# EAGLE board microSRCPProMiniV3 (EAGLE 6.5.0)
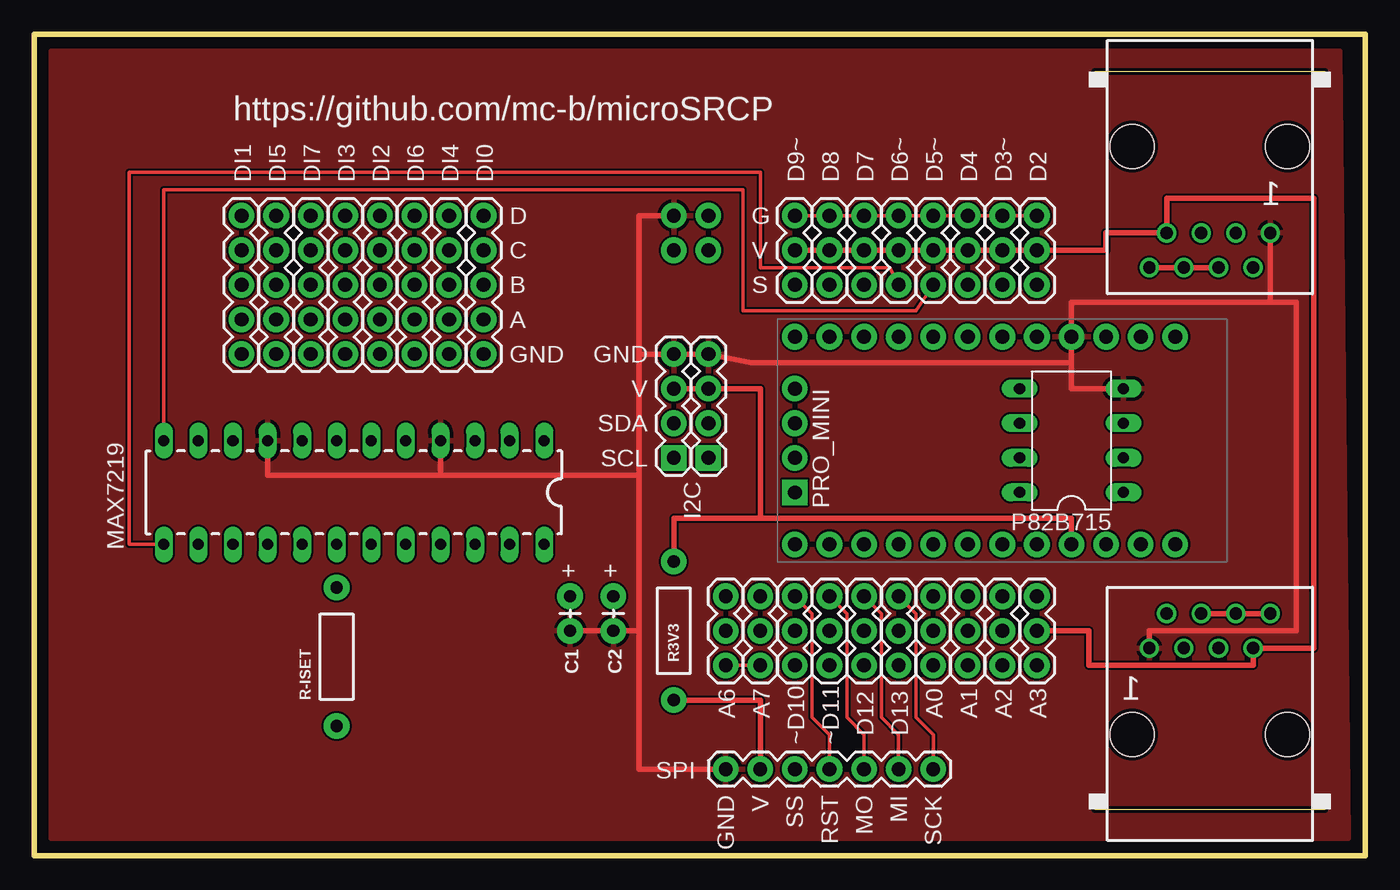
[diagram p0: board, top side]
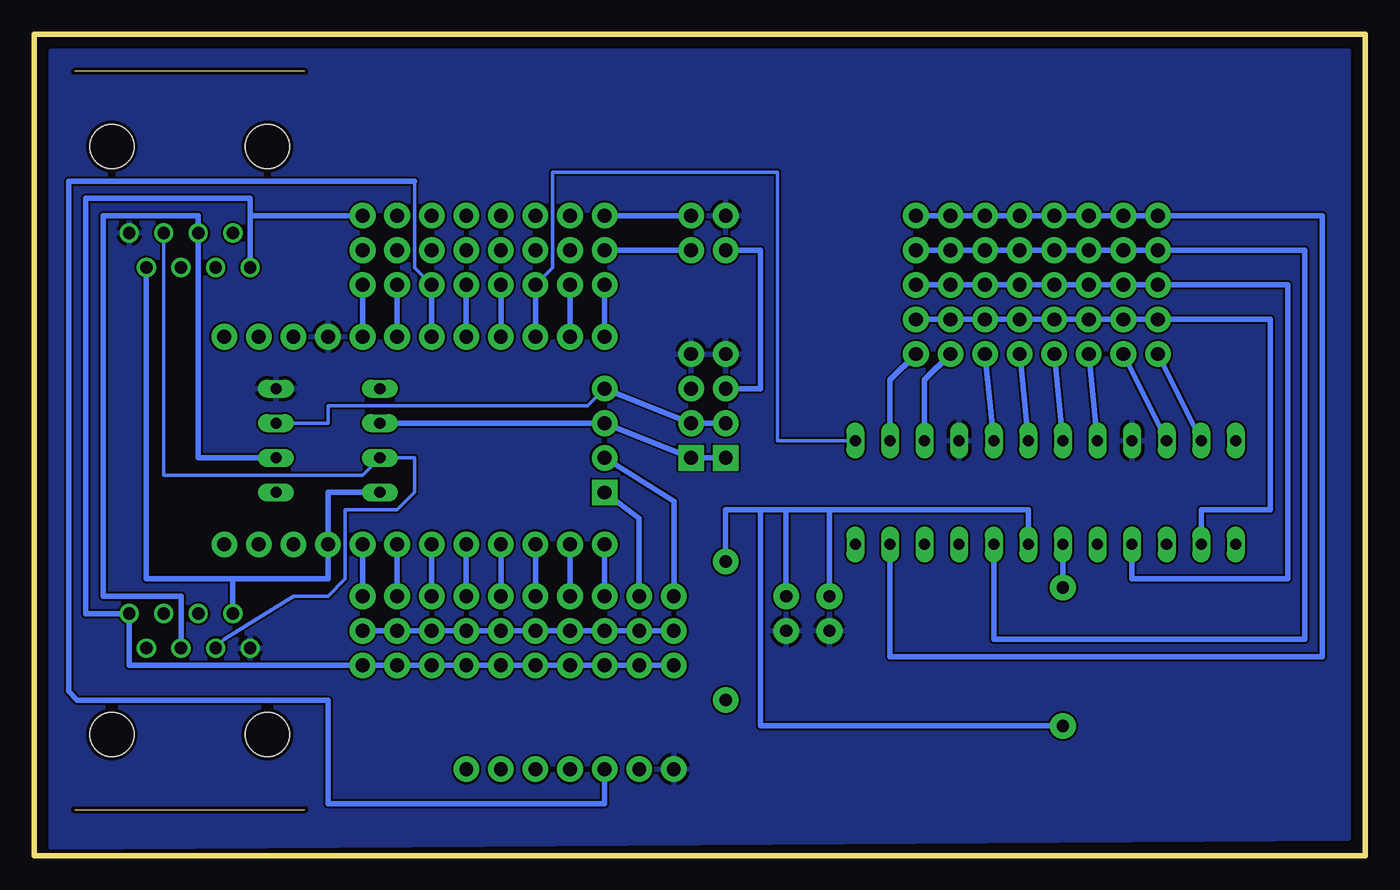
[diagram p1: board, bottom side, seen from below]

Size 97.79 x 60.33 mm. Coordinates in mm from the lower left corner, seen from the top.
Outline: 0,0 97.79,0 97.79,60.33 0,60.33 0,0
Copper layers (1*16): Top 0.035mm / dielectric 1.5mm / Bottom 0.035mm
Design rules "Elecrow_2-layer_eagle_rule": minimum track width 6mil, minimum drill 12mil, track to track 6mil, track to pad 6mil, pad to pad 6mil, via to via 6mil, smd to smd 0mil, copper to edge 10mil, drill to drill 10mil, minimum pad ring 10mil, minimum via ring 6mil, stop-mask expansion 2mil, vias tented up to drill 100mil, thermal gap 10mil

## Footprints (pad centres in the part's own frame; a part is rotated, then mirrored left to right if it is on the bottom)
1X03 = drill 1.016 pad 1.88: 1 0,0; 2 2.54,0; 3 5.08,0
AXIAL-0.1 = drill 0.9 pad 1.88: P$1 0,0; P$2 2.54,0
1X05 = drill 1.016 pad 1.88: 1 0,0; 2 2.54,0; 3 5.08,0; 4 7.62,0; 5 10.16,0
1X04_NO_SILK = drill 1.016 pad 1.88 square: 1 0,0 | drill 1.016 pad 1.88: 2 2.54,0; 3 5.08,0; 4 7.62,0
1X04 = drill 1.016 pad 1.88 square: 1 0,0 | drill 1.016 pad 1.88: 2 2.54,0; 3 5.08,0; 4 7.62,0
AXIAL-0.4 = drill 0.9 pad 1.88: P$1 -5.08,0; P$2 5.08,0
RJ45-NO-SHIELD = drill 0.9 pad 1.4: 1 -4.445,6.35; 2 -3.175,8.89; 3 -1.905,6.35; 4 -0.635,8.89; 5 0.635,6.35; 6 1.905,8.89; 7 3.175,6.35; 8 4.445,8.89 | hole 3.251: -5.715,0; 5.715,0
1X02_NO_SILK = drill 1.016 pad 1.88: 1 0,0; 2 2.54,0
DIL24 = drill 0.813 long: 1 -13.97,-3.81; 2 -11.43,-3.81; 3 -8.89,-3.81; 4 -6.35,-3.81; 5 -3.81,-3.81; 6 -1.27,-3.81; 7 1.27,-3.81; 8 3.81,-3.81; 9 6.35,-3.81; 10 8.89,-3.81; 11 11.43,-3.81; 12 13.97,-3.81; 13 13.97,3.81; 14 11.43,3.81; 15 8.89,3.81; 16 6.35,3.81; 17 3.81,3.81; 18 1.27,3.81; 19 -1.27,3.81; 20 -3.81,3.81; 21 -6.35,3.81; 22 -8.89,3.81; 23 -11.43,3.81; 24 -13.97,3.81
DIL-08 = drill 0.813 long: 1 -3.81,-3.81; 2 -1.27,-3.81; 3 1.27,-3.81; 4 3.81,-3.81; 5 3.81,3.81; 6 1.27,3.81; 7 -1.27,3.81; 8 -3.81,3.81
ARDUINO_MINI = drill 1.016 pad 1.88: 1 -7.62,12.7; 2 -7.62,10.16; 3 -7.62,7.62; 4 -7.62,5.08; 5 -7.62,2.54; 6 -7.62,0; 7 -7.62,-2.54; 8 -7.62,-5.08; 9 -7.62,-7.62; 10 -7.62,-10.16; 11 -7.62,-12.7; 12 -7.62,-15.24; 13 7.62,-15.24; 14 7.62,-12.7; 15 7.62,-10.16; 16 7.62,-7.62; 17 7.62,-5.08; 18 7.62,-2.54; 19 7.62,0; 20 7.62,2.54; 21 7.62,5.08; 22 7.62,7.62; 23 7.62,10.16; 24 7.62,12.7
1X07 = drill 1.016 pad 1.88: 1 0,0; 2 2.54,0; 3 5.08,0; 4 7.62,0; 5 10.16,0; 6 12.7,0; 7 15.24,0

## Placement (x,y rotation side)
A0  [1X03]  66.04,13.97 90 top
A1  [1X03]  68.58,13.97 90 top
A2  [1X03]  71.12,13.97 90 top
A3  [1X03]  73.66,13.97 90 top
A6  [1X03]  50.8,13.97 90 top
A7  [1X03]  53.34,13.97 90 top
C1  [AXIAL-0.1]  39.37,16.51 90 top
C2  [AXIAL-0.1]  42.55,16.51 90 top
D2  [1X03]  73.66,41.91 90 top
D3~  [1X03]  71.12,41.91 90 top
D4  [1X03]  68.58,41.91 90 top
D5~  [1X03]  66.04,41.91 90 top
D6~  [1X03]  63.5,41.91 90 top
D7  [1X03]  60.96,41.91 90 top
D8  [1X03]  58.42,41.91 90 top
D9~  [1X03]  55.88,41.91 90 top
D12  [1X03]  60.96,13.97 90 top
D13  [1X03]  63.5,13.97 90 top
DI0  [1X05]  33.02,36.83 90 top
DI1  [1X05]  15.24,36.83 90 top
DI2  [1X05]  25.4,36.83 90 top
DI3  [1X05]  22.86,36.83 90 top
DI4  [1X05]  30.48,36.83 90 top
DI5  [1X05]  17.78,36.83 90 top
DI6  [1X05]  27.94,36.83 90 top
DI7  [1X05]  20.32,36.83 90 top
E$1  [1X04_NO_SILK]  55.88,26.67 90 top
E$2  [1X04]  46.99,29.21 90 top
E$3  R3V3  [AXIAL-0.4]  46.99,16.51 90 top
E$4  [RJ45-NO-SHIELD]  86.36,8.89 0 top
E$5  [RJ45-NO-SHIELD]  86.36,52.07 180 top
GND  [1X02_NO_SILK]  49.53,44.45 90 top
I2C  [1X04]  49.53,29.21 90 top
MAX7219  [DIL24]  23.5,26.67 180 top
P82B715  [DIL-08]  76.2,30.48 90 top
PRO_MINI  [ARDUINO_MINI]  71.12,30.48 270 top
R-ISET  [AXIAL-0.4]  22.23,14.61 90 top
SPI  [1X07]  50.8,6.35 0 top
V5  [1X02_NO_SILK]  46.99,44.45 90 top
~D10  [1X03]  55.88,13.97 90 top
~D11  [1X03]  58.42,13.97 90 top

## Library data of the parts
A0 A1-A3 A6 A7 D2 D3~ D4 D5~ D6~ D7 D8 D9~ D12 D13 DI0 DI1-DI7 E$1 E$2 GND I2C SPI V5 ~D10 ~D11 = SparkFun-Connectors
C1 C2 = SparkFun-Resistors
E$3 = SparkFun-Passives
E$4 E$5 = con-tycoelectronics
MAX7219 = SparkFun-DigitalIC
P82B715 = SparkFun-AnalogIC
PRO_MINI = SparkFun-Boards
R-ISET = SparkFun-Capacitors

## Nets
2-5V: A0.2 A1.2 A2.2 A3.2 A6.2 A7.2 D2.2 D3~.2 D4.2 D5~.2 D6~.2 D7.2 D8.2 D9~.2 D12.2 D13.2 E$4.7 E$5.7 GND.1 ~D10.2 ~D11.2
2-GND: A0.1 A1.1 A2.1 A3.1 A6.1 A7.1 D2.3 D3~.3 D4.3 D5~.3 D6~.3 D7.3 D8.3 D9~.3 D12.1 D13.1 E$4.4 E$4.6 E$4.8 E$5.4 E$5.6 E$5.8 GND.2 ~D10.1 ~D11.1
5V: C1.P$2 C2.P$2 E$2.3 E$3.P$2 E$4.2 E$5.2 I2C.3 MAX7219.19 P82B715.8 PRO_MINI.21 R-ISET.P$1 V5.1
GND: C1.P$1 C2.P$1 E$2.4 E$4.1 E$5.1 I2C.4 MAX7219.4 MAX7219.9 P82B715.4 PRO_MINI.4 SPI.1 V5.2
LSDA: E$4.5 E$5.5 P82B715.2
LSDL: E$4.3 E$5.3 P82B715.7
S$1: E$3.P$1 SPI.2
S$2: D2.1 PRO_MINI.5
S$3: D3~.1 PRO_MINI.6
S$4: D4.1 PRO_MINI.7 SPI.3
S$5: D5~.1 MAX7219.12 PRO_MINI.8
S$6: D6~.1 MAX7219.13 PRO_MINI.9
S$7: D7.1 MAX7219.1 PRO_MINI.10
S$8: D8.1 PRO_MINI.11
S$9: D9~.1 PRO_MINI.12
S$10: PRO_MINI.13 SPI.4 ~D10.3
S$11: PRO_MINI.14 SPI.5 ~D11.3
S$12: D12.3 PRO_MINI.15 SPI.6
S$13: D13.3 PRO_MINI.16 SPI.7
S$14: A0.3 PRO_MINI.17
S$15: A1.3 PRO_MINI.18
S$16: A2.3 PRO_MINI.19
S$17: A3.3 PRO_MINI.20
S$18: DI0.1 MAX7219.2
S$19: DI4.1 MAX7219.3
S$20: DI6.1 MAX7219.5
S$21: DI2.1 MAX7219.6
S$22: DI3.1 MAX7219.7
S$23: DI7.1 MAX7219.8
S$24: DI5.1 MAX7219.10
S$25: DI1.1 MAX7219.11
S$26: DI0.2 DI1.2 DI2.2 DI3.2 DI4.2 DI5.2 DI6.2 DI7.2 MAX7219.14
S$27: MAX7219.18 R-ISET.P$2
S$28: DI0.4 DI1.4 DI2.4 DI3.4 DI4.4 DI5.4 DI6.4 DI7.4 MAX7219.20
S$29: DI0.5 DI1.5 DI2.5 DI3.5 DI4.5 DI5.5 DI6.5 DI7.5 MAX7219.23
S$32: DI0.3 DI1.3 DI2.3 DI3.3 DI4.3 DI5.3 DI6.3 DI7.3 MAX7219.16
S$A6: A6.3 E$1.2
S$A7: A7.3 E$1.1
SDA: E$1.4 E$2.2 I2C.2 P82B715.3
SDL: E$1.3 E$2.1 I2C.1 P82B715.6

## Tracks (layer width: path | path; a pad name or v marks a point on that pad's centre or on a via)
2-5V
  Top 0.406: A3.2 77.47,16.51 77.47,13.97 89.53,13.97 E$4.7 93.98,15.24 93.98,48.26 83.19,48.26 E$5.7 78.74,45.72 78.74,44.45 D2.2 D3~.2 D4.2 D5~.2 D6~.2 D7.2 D8.2 D9~.2
  Bottom 0.406: A3.2 A2.2 A1.2 A0.2 D13.2 D12.2 ~D11.2 ~D10.2 A7.2 A6.2 | D9~.2 GND.1
2-GND
  Top 0.254: D9~.3 D8.3 D7.3 D6~.3 D5~.3 D4.3 D3~.3 D2.3 | A7.1 A6.1
  Top 0.406: E$5.8 E$5.6 E$5.4 | E$4.8 E$4.6 E$4.4
  Bottom 0.406: 81.92,46.99 D2.3 | 81.92,46.99 E$5.8 | 81.92,46.99 81.92,48.26 93.98,48.26 93.98,17.78 E$4.8 90.81,13.97 A3.1 A2.1 A1.1 A0.1 D13.1 D12.1 ~D11.1 ~D10.1 A7.1 A6.1 | D9~.3 GND.2
5V
  Top 0.406: PRO_MINI.21 76.2,24.77 53.34,24.77 | 53.34,24.77 53.34,34.29 I2C.3 E$2.3 | 53.34,24.77 46.99,24.77 E$3.P$2
  Bottom 0.406: 83.19,20.32 89.53,20.32 E$5.2 | 83.19,20.32 76.2,20.32 PRO_MINI.21 76.2,26.67 P82B715.8 | E$4.2 83.19,20.32 | E$2.3 44.45,34.29 44.45,44.45 V5.1 | E$3.P$2 46.99,25.4 44.45,25.4 | 44.45,25.4 42.55,25.4 | 42.55,25.4 39.37,25.4 | 39.37,25.4 24.77,25.4 MAX7219.19 | 44.45,25.4 44.45,9.53 R-ISET.P$1 | C2.P$2 42.55,25.4 | C1.P$2 39.37,25.4
GND
  Top 0.406: 90.81,40.64 92.71,40.64 92.71,16.51 81.92,16.51 E$4.1 | 90.81,40.64 76.2,40.64 PRO_MINI.4 76.2,36.2 | 76.2,36.2 76.2,34.29 P82B715.4 | E$5.1 90.81,40.64 | 76.2,36.2 52.7,36.2 I2C.4 E$2.4 44.45,36.83 | 44.45,36.83 44.45,27.94 | 44.45,27.94 44.45,16.51 | 44.45,16.51 44.45,6.35 SPI.1 | 44.45,36.83 44.45,46.99 V5.2 | MAX7219.4 29.84,27.94 | 29.84,27.94 17.14,27.94 MAX7219.9 | 29.84,27.94 44.45,27.94 | 44.45,16.51 C2.P$1 C1.P$1
  pour Bottom: 1.27,59.05 1.27,1.27 96.52,0.64 96.52,59.05 1.91,59.05
  pour Top: 1.27,59.05 1.27,1.27 96.52,1.27 95.89,59.05
LSDA
  Bottom 0.406: P82B715.2 85.72,29.21 E$5.5 85.72,46.99 92.71,46.99 92.71,19.05 87,19.05 E$4.5
LSDL
  Bottom 0.254: E$5.3 88.27,27.94 73.66,27.94 P82B715.7 69.85,29.21 69.85,26.67 71.12,25.4 74.93,25.4 74.93,20.32 76.2,19.05 78.74,19.05 83.82,15.88 E$4.3
S$1
  Top 0.406: E$3.P$1 53.34,11.43 SPI.2
S$2
  Bottom 0.406: PRO_MINI.5 D2.1
S$3
  Bottom 0.406: PRO_MINI.6 D3~.1
S$4
  Bottom 0.254: D4.1 69.85,43.18 69.85,49.53
  Bottom 0.406: PRO_MINI.7 D4.1 | 69.85,49.53 95.25,49.53 95.25,12.06 94.61,11.43 76.2,11.43 76.2,3.81 55.88,3.81 SPI.3
S$5
  Top 0.254: D5~.1 64.77,40.01 52.07,40.01 52.07,48.9 9.53,48.9 MAX7219.12
  Bottom 0.406: PRO_MINI.8 D5~.1
S$6
  Top 0.254: D6~.1 62.87,43.18 53.34,43.18 53.34,50.16 6.99,50.16 6.99,22.86 MAX7219.13
  Bottom 0.406: PRO_MINI.9 D6~.1
S$7
  Bottom 0.254: D7.1 59.69,43.18 59.69,50.16 43.18,50.16 43.18,30.48 MAX7219.1
  Bottom 0.406: PRO_MINI.10 D7.1
S$8
  Bottom 0.406: PRO_MINI.11 D8.1
S$9
  Bottom 0.406: PRO_MINI.12 D9~.1
S$10
  Top 0.254: ~D10.3 57.15,17.78 57.15,10.16 58.42,8.89 SPI.4
  Bottom 0.406: PRO_MINI.13 ~D10.3
S$11
  Top 0.254: ~D11.3 59.69,17.78 59.69,10.16 60.96,8.89 SPI.5
  Bottom 0.406: PRO_MINI.14 ~D11.3
S$12
  Top 0.254: D12.3 62.23,17.78 62.23,10.16 63.5,8.89 SPI.6
  Bottom 0.406: PRO_MINI.15 D12.3
S$13
  Top 0.254: D13.3 64.77,17.78 64.77,10.16 66.04,8.89 SPI.7
  Bottom 0.406: PRO_MINI.16 D13.3
S$14
  Bottom 0.406: PRO_MINI.17 A0.3
S$15
  Bottom 0.406: PRO_MINI.18 A1.3
S$16
  Bottom 0.406: PRO_MINI.19 A2.3
S$17
  Bottom 0.406: PRO_MINI.20 A3.3
S$18
  Bottom 0.406: MAX7219.2 34.92,34.92 DI0.1
S$19
  Bottom 0.406: MAX7219.3 32.38,34.92 DI4.1
S$20
  Bottom 0.406: DI6.1 MAX7219.5
S$21
  Bottom 0.406: DI2.1 MAX7219.6
S$22
  Bottom 0.406: DI3.1 MAX7219.7
S$23
  Bottom 0.406: DI7.1 MAX7219.8
S$24
  Bottom 0.406: DI5.1 MAX7219.10
S$25
  Bottom 0.406: DI1.1 MAX7219.11
S$26
  Bottom 0.406: MAX7219.14 12.06,25.4 6.99,25.4 6.99,39.37 DI1.2 DI5.2 DI7.2 DI3.2 DI2.2 DI6.2 DI4.2 DI0.2
S$27
  Bottom 0.406: MAX7219.18 R-ISET.P$2
S$28
  Bottom 0.406: DI0.4 DI4.4 DI6.4 DI2.4 DI3.4 DI7.4 DI5.4 DI1.4 4.45,44.45 4.45,15.88 27.3,15.88 MAX7219.20
S$29
  Bottom 0.406: MAX7219.23 34.92,14.61 3.17,14.61 3.17,46.99 DI1.5 DI5.5 DI7.5 DI3.5 DI2.5 DI6.5 DI4.5 DI0.5
S$32
  Bottom 0.406: DI0.3 DI4.3 DI6.3 DI2.3 DI3.3 DI7.3 DI5.3 DI1.3 5.71,41.91 5.71,20.32 17.14,20.32 MAX7219.16
S$A6
  Bottom 0.406: E$1.2 50.8,26.04 A6.3
S$A7
  Bottom 0.406: E$1.1 53.34,24.77 A7.3
SDA
  Bottom 0.254: P82B715.3 76.2,31.75 76.2,33.02 57.15,33.02 E$1.4
  Bottom 0.406: E$1.4 I2C.2 E$2.2
SDL
  Bottom 0.406: P82B715.6 E$1.3 I2C.1 E$2.1

## Text on the board
tNames: https://github.com/mc-b/microSRCP | 1 | G / V / S | D / C / B / A / GND | GND / V / SDA / SCL | + + | 1 | GND / V / SS / RST / MO / MI / SCK